# EAGLE board doorctrl (EAGLE 5.10)
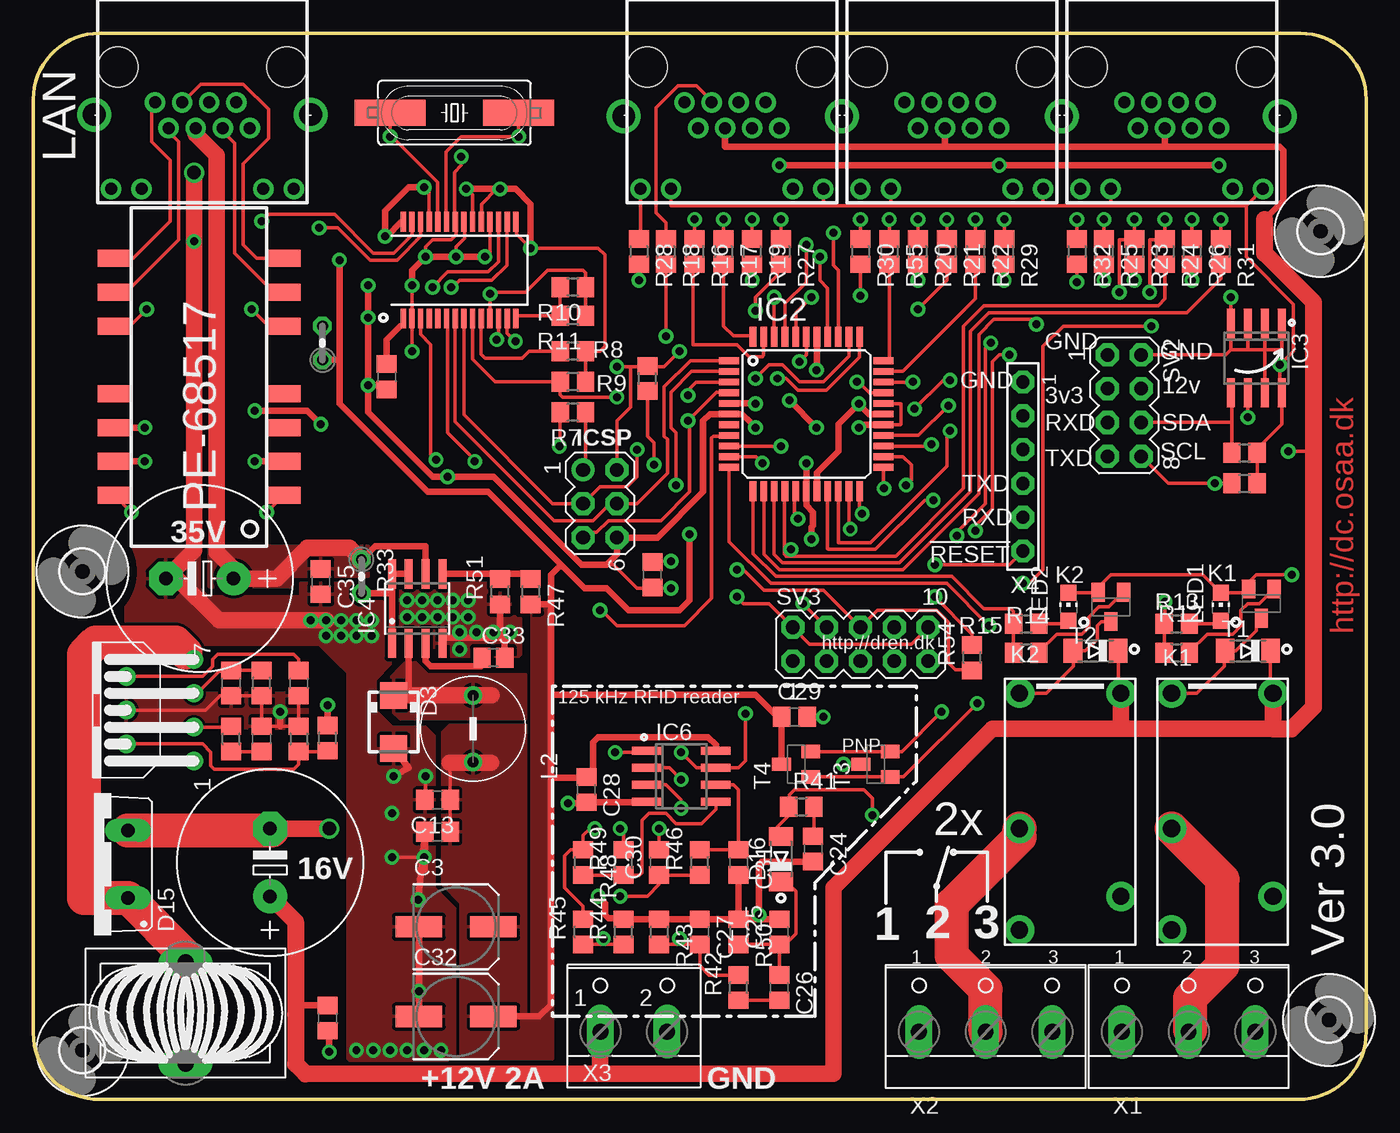
[diagram p0: board, top side]
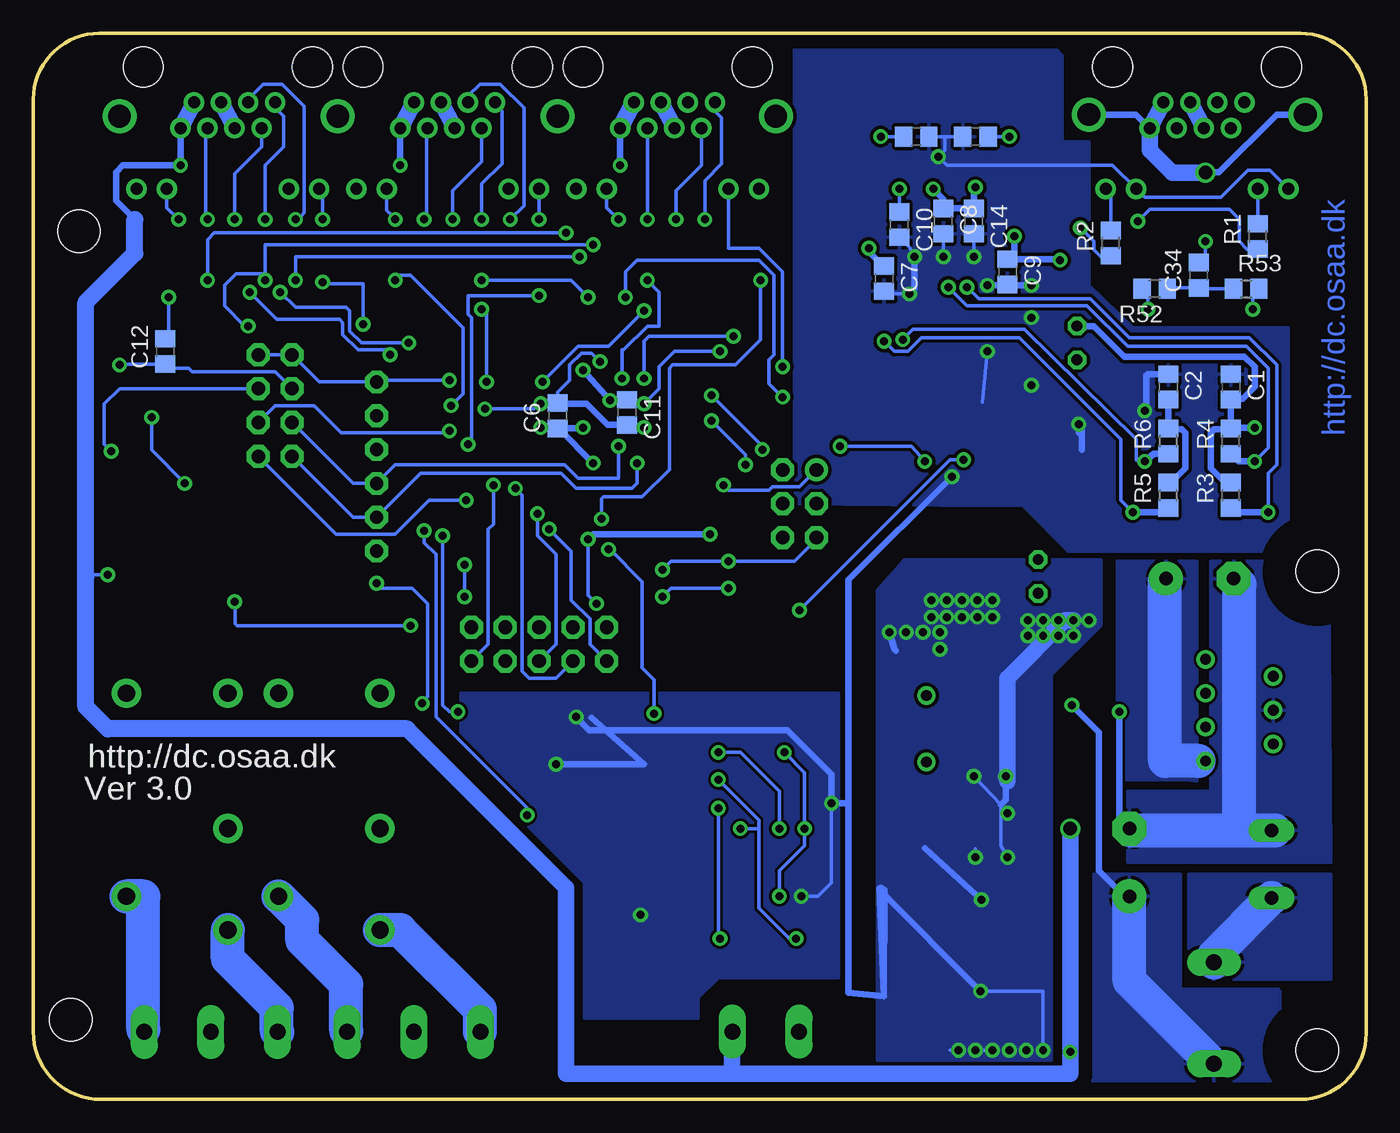
[diagram p1: board, bottom side, seen from below]

Size 100.08 x 80.01 mm. Coordinates in mm from the lower left corner, seen from the top.
Outline: 95.05,80 4.95,80
Outline: 5.08,80.01 4.95,80.01 arc90 0,75.06 0,4.95 arc90 4.95,0 95,0 arc90 100.08,5.08 100.08,75.06 arc90 95.12,80.01 95,80.01
Copper layers (1*16): Top 0.035mm / dielectric 1.5mm / Bottom 0.035mm
Design rules "8mils *": minimum track width 8mil, minimum drill 0.6mm, track to track 8mil, track to pad 8mil, pad to pad 8mil, via to via 8mil, smd to smd 8mil, copper to edge 40mil, drill to drill 10mil, minimum pad ring 8mil, minimum via ring 10mil, stop-mask expansion 0mil, vias tented up to drill 0mil, thermal gap 10mil

## Footprints (pad centres in the part's own frame; a part is rotated, then mirrored left to right if it is on the bottom)
C0805 = smd 1.3 x 1.5: 1 -0.95,0; 2 0.95,0
SANYO-OSCON_SMD_C6 = smd 3.5 x 1.6: + 2.8,0; - -2.8,0
E5-13 = drill 1.016 pad 2.54 round: + -2.54,0 | drill 1.016 pad 2.54 octagon: - 2.54,0
C0805' = smd 1.3 x 1.5: 1 -0.85,0; 2 0.85,0
MINIMELF = smd 1.4 x 1.8: A 1.7,0; C -1.7,0
SMA = smd 2 x 2: A 2,0; C -2,0
TO220ACS = drill 1.016 long: A 2.54,-2.54; C -2.54,-2.54
SSOP28 = smd 0.4 x 1.5: 1 -4.225,-3.625; 2 -3.575,-3.625; 3 -2.925,-3.625; 4 -2.275,-3.625; 5 -1.625,-3.625; 6 -0.975,-3.625; 7 -0.325,-3.625; 8 0.325,-3.625; 9 0.975,-3.625; 10 1.625,-3.625; 11 2.275,-3.625; 12 2.925,-3.625; 13 3.575,-3.625; 14 4.225,-3.625; 15 4.225,3.625; 16 3.575,3.625; 17 2.925,3.625; 18 2.275,3.625; 19 1.625,3.625; 20 0.975,3.625; 21 0.325,3.625; 22 -0.325,3.625; 23 -0.975,3.625; 24 -1.625,3.625; 25 -2.275,3.625; 26 -2.925,3.625; 27 -3.575,3.625; 28 -4.225,3.625
TQFP44 = smd 1.5 x 0.5: 1 -5.8,4; 2 -5.8,3.2; 3 -5.8,2.4; 4 -5.8,1.6; 5 -5.8,0.8; 6 -5.8,0; 7 -5.8,-0.8; 8 -5.8,-1.6; 9 -5.8,-2.4; 10 -5.8,-3.2; 11 -5.8,-4; 23 5.8,-4; 24 5.8,-3.2; 25 5.8,-2.4; 26 5.8,-1.6; 27 5.8,-0.8; 28 5.8,0; 29 5.8,0.8; 30 5.8,1.6; 31 5.8,2.4; 32 5.8,3.2; 33 5.8,4 | smd 0.5 x 1.5: 12 -4,-5.8; 13 -3.2,-5.8; 14 -2.4,-5.8; 15 -1.6,-5.8; 16 -0.8,-5.8; 17 0,-5.8; 18 0.8,-5.8; 19 1.6,-5.8; 20 2.4,-5.8; 21 3.2,-5.8; 22 4,-5.8; 34 4,5.8; 35 3.2,5.8; 36 2.4,5.8; 37 1.6,5.8; 38 0.8,5.8; 39 0,5.8; 40 -0.8,5.8; 41 -1.6,5.8; 42 -2.4,5.8; 43 -3.2,5.8; 44 -4,5.8
SO-08 = smd 0.6 x 2.2: 1 -1.905,-2.6; 2 -0.635,-2.6; 3 0.635,-2.6; 4 1.905,-2.6; 5 1.905,2.6; 6 0.635,2.6; 7 -0.635,2.6; 8 -1.905,2.6
SO08 = smd 0.6 x 2.2: 1 -1.905,-2.6; 2 -0.635,-2.6; 3 0.635,-2.6; 4 1.905,-2.6; 5 1.905,2.6; 6 0.635,2.6; 7 -0.635,2.6; 8 -1.905,2.6
HEPTAWATT = drill 0.813 round: 1 3.81,5.08; 2 2.54,0; 3 1.27,5.08; 4 0,0; 5 -1.27,5.08; 6 -2.54,0; 7 -3.81,5.08
G5SB = drill 1.3 pad 1.93 round: 1 7.62,3.81; 5 7.62,-3.81 | drill 1.3 pad 2.184 round: 2 -2.54,3.81; 3 -10.16,3.81; 4 -7.62,-3.81
0204V@1 = drill 0.813 octagon: 1 -1.27,0; 2 1.27,0
WE-TI_L = drill 0.813 round: 1 -2.5,0; 2 2.5,0
A26GFC = drill 1.194 long: 1 0,3.81; 2 0,-3.81
CHIP-LED0805 = smd 1.2 x 1.2: A 0,-1.05; C 0,1.05
RJ45 = drill 0.9 pad 1.27 round: 1 9.906,2.64; 2 8.89,4.58; 3 7.874,2.64; 4 6.858,4.58; 5 5.842,2.64; 6 4.826,4.58; 7 3.81,2.64; 8 2.794,4.58; 9 13.208,9.144; 10 10.922,9.144; 11 1.778,9.144; 12 -0.508,9.144 | hole 3: 0,0; 12.7,0
HC49UP = smd 5.334 x 1.93: 1 -4.826,0; 2 4.826,0
R0805 = smd 1.3 x 1.5: 1 -0.95,0; 2 0.95,0
0204V = drill 0.813 octagon: 1 -1.27,0; 2 1.27,0
MA03-2 = drill 1.016 round: 1 -2.54,-1.27 | drill 1.016 octagon: 2 -2.54,1.27; 3 0,-1.27; 4 0,1.27; 5 2.54,-1.27; 6 2.54,1.27
MA04-2 = drill 1.016 octagon: 1 -3.81,-1.27; 2 -3.81,1.27; 3 -1.27,-1.27; 4 -1.27,1.27; 5 1.27,-1.27; 6 1.27,1.27; 7 3.81,-1.27; 8 3.81,1.27
MA05-2 = drill 1.016 octagon: 1 -5.08,-1.27; 2 -5.08,1.27; 3 -2.54,-1.27; 4 -2.54,1.27; 5 0,-1.27; 6 0,1.27; 7 2.54,-1.27; 8 2.54,1.27; 9 5.08,-1.27; 10 5.08,1.27
SOT23-BEC = smd 1 x 1.4: B -0.95,-1.1; C 0,1.1; E 0.95,-1.1
PE-68517 = smd 2.54 x 1.27: 1 -7.62,7.62; 2 -7.62,5.08; 3 -7.62,2.54; 4 -7.62,0; 6 -7.62,-5.08; 7 -7.62,-7.62; 8 -7.62,-10.16; 9 5.08,-10.16; 10 5.08,-7.62; 11 5.08,-5.08; 13 5.08,0; 14 5.08,2.54; 15 5.08,5.08; 16 5.08,7.62
3,2 = hole 3.2: 0,0
W237-103 = drill 1.194 long: 1 -5,-1.29; 2 0,-1.29; 3 5,-1.29
W237-102 = drill 1.194 long: 1 -2.5,-1.27; 2 2.5,-1.27
TSW-106-02-S-S = drill 1 pad 1.5 octagon: 1 6.35,0; 2 3.81,0; 3 1.27,0; 4 -1.27,0; 5 -3.81,0; 6 -6.35,0

## Placement (x,y rotation side)
C1  100nF  [C0805]  10.16,53.47 270 bottom
C2  100nF  [C0805]  14.86,53.47 270 bottom
C3  100uF  [SANYO-OSCON_SMD_C6]  31.75,12.95 0 top
C4  15p  [C0805]  29.34,72.26 180 bottom
C5  15p  [C0805]  33.78,72.26 0 bottom
C6  100nF  [C0805]  60.71,51.31 90 bottom
C7  100nF  [C0805]  36.2,61.59 270 bottom
C8  100nF  [C0805]  31.75,65.91 270 bottom
C9  100nF  [C0805]  26.92,62.1 270 bottom
C10  100nF  [C0805]  35.05,65.66 270 bottom
C11  100nF  [C0805]  55.5,51.56 270 bottom
C12  100nF  [C0805]  90.17,56.13 90 bottom
C13  100nF  [C0805]  30.35,22.48 180 top
C14  100nF  [C0805]  29.46,65.91 270 bottom
C15  10uF  [C0805]  30.35,20.07 180 top
C16  10uF  [C0805]  26.54,54.23 270 top
C17  1200uF/35V  [E5-13]  12.5,39.09 180 top
C18  1000uF/16V  [E5-13]  17.78,17.78 90 top
C19  100nF  [C0805]  22.1,6.1 270 top
C20  2.2 uF  [C0805]  19.94,31.24 270 top
C21  2.2 nF  [C0805]  14.86,31.24 270 top
C22  33nF  [C0805]  17.14,27.05 90 top
C23  100nF  [C0805]  46.48,39.37 270 top
C24  3n3  [C0805]  58.55,18.8 270 top
C25  1nF  [C0805]  56.01,12.57 90 top
C26  100nF  [C0805]  56.01,8.38 270 top
C27  1nF  [C0805]  50.04,12.57 270 top
C28  100nF  [C0805]  41.53,23.24 270 top
C29  100nF  [C0805]  57.15,28.7 0 top
C30  1nF  [C0805]  46.99,17.78 90 top
C31  100nF  [C0805]  52.96,17.78 270 top
C32  100uF  [SANYO-OSCON_SMD_C6]  31.75,6.22 0 top
C33  82pF  [C0805']  34.54,33.15 0 top
C34  1nF  [C0805]  12.57,61.85 90 bottom
C35  10uF  [C0805]  21.59,38.86 270 top
D1  [MINIMELF]  91.19,33.66 180 top
D2  [MINIMELF]  79.76,33.66 180 top
D3  SK 34SMA  [SMA]  27.05,28.32 270 top
D15  [TO220ACS]  4.57,17.65 90 top
D16  [MINIMELF]  56.13,18.03 90 top
IC1  ENC28J60SS  [SSOP28]  32,62.23 0 top
IC2  ATMEGA324  [TQFP44]  58.04,51.44 0 top
IC3  24LC64SN  [SO-08]  91.82,55.63 180 top
IC4  MC34063AD  [SO08]  28.83,36.83 0 top
IC5  L4960  [HEPTAWATT]  6.99,29.21 270 top
IC6  LM358  [SO08]  48.64,24.26 270 top
K1  HF33F/012-ZS3 047  [G5SB]  89.28,22.86 90 top
K2  HF33F/012-ZS3 047  [G5SB]  77.85,22.86 90 top
L1  ferrite bead  [0204V@1]  21.72,56.77 90 top
L2  330uH  [WE-TI_L]  33.02,27.81 90 top
L3  220uH  [A26GFC]  11.43,6.48 0 top
LED1  [CHIP-LED0805]  89.15,36.96 0 top
LED2  [CHIP-LED0805]  77.72,36.96 0 top
P0  RJHSE-5085  [RJ45]  91.82,77.47 180 top
P1  RJHSE-5085  [RJ45]  75.31,77.47 180 top
P2  RJHSE-5085  [RJ45]  58.8,77.47 180 top
Q1  25MHz  [HC49UP]  31.62,74.04 0 top
R1  1k  [R0805]  8.13,64.77 90 bottom
R2  1k  [R0805]  19.18,64.26 90 bottom
R3  50R  [R0805]  10.16,45.34 90 bottom
R4  50R  [R0805]  10.16,49.4 90 bottom
R5  50R  [R0805]  14.86,45.34 90 bottom
R6  50R  [R0805]  14.86,49.4 90 bottom
R7  330R  [R0805]  40.51,51.56 180 top
R8  10k  [R0805]  40.51,56.13 180 top
R9  10k  [R0805]  40.51,53.85 180 top
R10  2k7  [R0805]  40.51,60.96 180 top
R11  18k  [R0805]  40.51,58.8 180 top
R12  4k7  [R0805]  85.85,33.53 0 top
R13  1k  [R0805]  85.85,35.69 0 top
R14  4k7  [R0805]  74.55,33.53 0 top
R15  1k  [R0805]  74.55,35.69 0 top
R16  1k  [R0805]  49.66,63.63 270 top
R17  1k  [R0805]  51.82,63.63 270 top
R18  1k  [R0805]  47.5,63.63 270 top
R19  1k  [R0805]  53.98,63.63 270 top
R20  1k  [R0805]  66.42,63.63 270 top
R21  1k  [R0805]  68.58,63.63 270 top
R22  1k  [R0805]  70.74,63.63 270 top
R23  1k  [R0805]  82.68,63.63 270 top
R24  1k  [R0805]  84.96,63.63 270 top
R25  1k  [R0805]  80.39,63.63 270 top
R26  1k  [R0805]  87,63.63 270 top
R27  1k  [R0805]  56.13,63.63 270 top
R28  1k  [R0805]  45.47,63.63 270 top
R29  1k  [R0805]  72.9,63.63 270 top
R30  1k  [R0805]  62.1,63.63 270 top
R31  1k  [R0805]  89.15,63.63 270 top
R32  1k  [R0805]  78.36,63.63 270 top
R33  0.22R  [0204V]  24.64,39.24 270 top
R34  6k2  [R0805]  22.1,27.11 90 top
R35  4k7  [R0805]  19.94,27.05 270 top
R36  15k  [R0805]  14.86,27.05 90 top
R37  4k7  [R0805]  17.14,31.24 90 top
R38  10k  [R0805]  46.1,54.1 90 top
R39  1k  [R0805]  90.93,46.23 0 top
R40  1k  [R0805]  90.93,48.51 0 top
R41  10R  [R0805]  57.66,21.97 0 top
R42  10k  [R0805]  52.96,8.38 90 top
R43  100k  [R0805]  46.99,12.57 270 top
R44  330R  [R0805]  44.32,12.57 90 top
R45  22k  [R0805]  41.27,12.57 90 top
R46  100k  [R0805]  50.04,17.78 90 top
R47  18k  [R0805]  37.34,38.1 270 top
R48  1k  [R0805]  41.27,17.78 270 top
R49  10k  [R0805]  44.32,17.78 90 top
R50  100k  [R0805]  52.96,12.57 270 top
R51  11k  [R0805]  35.05,38.1 90 top
R52  75R  [R0805]  15.88,60.83 180 bottom
R53  75R  [R0805]  9.02,60.83 0 bottom
R54  330R  [R0805]  70.48,33.15 90 top
R55  1k  [R0805]  64.26,63.63 270 top
RJ45  RJHSE-5085  [RJ45]  19.05,77.47 180 top
SV1  ICSP  [MA03-2]  42.55,44.7 270 top
SV2  Ext  [MA04-2]  81.92,52.07 270 top
SV3  JTAG  [MA05-2]  62.1,34.16 0 top
T1  BC817  [SOT23-BEC]  92.2,37.21 180 top
T2  BC817  [SOT23-BEC]  80.9,36.96 180 top
T3  BC807  [SOT23-BEC]  63.25,25.15 90 top
T4  BC817  [SOT23-BEC]  57.28,25.15 90 top
U$1  PE-68517L  [PE-68517]  11.18,52.96 180 top
U$3  [3,2]  3.68,3.68 0 top
U$4  [3,2]  96.65,65.15 0 top
U$5  [3,2]  97.28,5.97 0 top
U$6  [3,2]  3.68,39.62 0 top
X1  [W237-103]  86.74,6.35 0 top
X2  [W237-103]  71.5,6.35 0 top
X3  [W237-102]  45.09,6.35 0 top
X4  ftdi  [TSW-106-02-S-S]  74.3,47.5 90 top

## Library data of the parts
C1-C32 C34 C35 L1 R1-R55 = rcl
C33 = resistor
D1-D3 D15 D16 = diode
IC1 = microchip-6
IC2 = atmel
IC3 = microchip
IC4 = v-reg-3
IC5 = l4960
IC6 = linear
K1 K2 = relay
L2 = wuerth-elektronik
L3 = inductors
LED1 LED2 = led
P0 P1 P2 RJ45 = amp-rj45-tap-up-with-leds
Q1 = crystal
SV1-SV3 = con-lstb
T1-T4 = transistor
U$1 = pulse-pe-68517-ethernet-trafo
U$3-U$6 = holes
X1-X3 = con-wago-500
X4 = con-samtec

## Nets
12VPULSE: D15.C IC5.7 L3.1
!RESET: C23.1 IC2.4 R38.1 R54.1 SV1.5 SV3.6
+3V3: C3.+ C6.1 C7.1 C8.1 C9.1 C10.1 C11.1 C12.1 C13.1 C14.1 C15.1 C28.1 C29.1 C32.+ IC1.15 IC1.19 IC1.20 IC1.25 IC1.28 IC2.5 IC2.17 IC2.27 IC2.29 IC2.38 IC3.8 IC6.8 L1.1 L2.1 P0.10 P0.12 P1.10 P1.12 P2.10 P2.12 R8.1 R9.1 R38.2 R39.2 R40.2 R47.2 SV1.2 SV2.3 SV3.4 T4.C
+12V: C18.+ C19.1 D1.C D2.C K1.5 K2.5 L3.2 P0.4 P0.5 P1.4 P1.5 P2.4 P2.5 R34.2 SV2.4 X3.1
+24V: C17.+ C35.1 IC4.6 IC5.1 R33.1 RJ45.4 RJ45.5
CLOCK: IC1.3 IC2.8
COIL-A: P0.1 R23.1 T3.E T4.E
COIL-B: D16.A P0.2 R24.1 R41.1
DTR: R54.2 X4.6
FC: IC5.3 R36.2
GND: C1.1 C2.1 C3.- C4.2 C5.2 C6.2 C7.2 C8.2 C9.2 C10.2 C11.2 C12.2 C13.2 C14.2 C15.2 C16.2 C17.- C18.- C19.2 C20.2 C21.2 C22.2 C23.2 C24.2 C25.2 C27.1 C28.2 C29.2 C31.2 C32.- C33.2 C34.2 C35.2 D3.A D15.A IC1.2 IC1.11 IC1.18 IC1.21 IC1.22 IC2.6 IC2.18 IC2.28 IC2.39 IC3.1 IC3.2 IC3.3 IC3.4 IC3.7 IC4.4 IC5.4 IC6.4 LED1.C LED2.C P0.7 P0.8 P1.7 P1.8 P2.7 P2.8 R10.1 R11.1 R35.1 R37.1 R43.1 R44.2 R50.1 R51.1 RJ45.7 RJ45.8 RJ45.9 RJ45.11 SV1.6 SV2.1 SV2.2 SV3.2 SV3.10 T1.E T2.E T3.C X3.2 X4.1
ICP: IC2.15 IC6.7 R24.2 R49.2
MEH1: P1.2 R21.1
MEH2: P1.1 R20.1
MISO: IC2.2 R7.1 SV1.1
MOSI: IC1.7 IC2.1 SV1.4
N$1: RJ45.1 U$1.9
N$2: RJ45.2 U$1.10
N$3: RJ45.3 U$1.8
N$4: RJ45.6 U$1.7
N$5: R2.2 RJ45.12
N$6: R1.2 RJ45.10
N$7: IC1.27 R1.1
N$8: IC1.26 R2.1
N$9: C1.2 L1.2 R3.2 R4.2 U$1.14
N$10: P1.3 R55.1
N$11: X4.2
N$12: IC1.10 R8.2
N$13: C2.2 R5.2 R6.2
N$14: X4.3
N$16: IC1.14 R10.2 R11.2
N$17: C16.1 IC1.1
N$18: C4.1 IC1.24 Q1.1
N$19: IC1.6 R7.2
N$20: C5.1 IC1.23 Q1.2
N$21: K2.4 X2.3
N$23: D1.A K1.1 T1.C
N$24: K1.2 X1.2
N$25: R12.2 T1.B
N$26: K1.3 X1.1
N$27: LED1.A R13.2
N$28: D2.A K2.1 T2.C
N$29: R14.2 T2.B
N$30: K1.4 X1.3
N$31: K2.2 X2.2
N$32: K2.3 X2.1
N$33: LED2.A R15.2
N$34: P2.3 R18.1
N$35: P2.2 R17.1
N$37: IC5.2 R34.1 R35.2
N$38: C21.1 IC5.5 R37.2
N$39: C22.1 R36.1
N$40: C20.1 IC5.6
N$41: P2.6 R19.1
N$42: P2.1 R16.1
N$45: R52.2 U$1.6
N$46: IC4.1 IC4.7 IC4.8 R33.2
N$47: R53.2 U$1.11
N$48: P0.3 R25.1
N$51: P2.9 R28.1
N$52: P2.11 R27.1
N$56: P1.6 R22.1
N$57: P1.9 R30.1
N$58: P1.11 R29.1
N$59: P0.6 R26.1
N$60: P0.9 R32.1
N$61: P0.11 R31.1
N$62: C24.1 R41.2
N$63: C25.1 C26.1 D16.C R50.2
N$64: C26.2 R42.1
N$65: C27.2 IC6.3 R42.2 R43.2
N$67: C30.2 IC6.2 R44.1 R45.1
N$68: C33.1 IC4.3
N$69: C31.1 IC6.6 R46.2
N$70: C30.1 IC6.1 R45.2 R46.1 R48.1
N$72: C34.1 R52.1 R53.1
N$76: IC4.5 R47.1 R51.2
N$81: IC6.5 R48.2 R49.1
PA0: IC2.37 R25.2
PA1: IC2.36 R26.2
PA2: IC2.35 R18.2
PA3: IC2.34 R19.2
PA4: IC2.33 R55.2
PA5: IC2.32 R22.2
PA6: IC2.31 R21.2
PA7: IC2.30 R27.2
PB0: IC2.40 R20.2
PB2: IC1.9 IC2.42 R9.2
PB3: IC2.43 R16.2
PB4: IC2.44 R17.2
PC6: IC2.25 R30.2
PC7: IC2.26 R29.2
PD2: IC2.11 R12.1 R13.1
PD3: IC2.12 R14.1 R15.1
PD4: IC2.13 R32.2
PD5: IC2.14 R31.2
PD7: IC2.16 R28.2
RXD: IC2.9 SV2.5 X4.4
SCK: IC1.8 IC2.3 SV1.3
SCL: IC2.19 IC3.6 R39.1 SV2.8
SDA: IC2.20 IC3.5 R40.1 SV2.6
SWE: D3.C IC4.2 L2.2
T1: IC2.41 R23.2 T3.B T4.B
TCK: IC2.21 SV3.1
TDI: IC2.24 SV3.9
TDO: IC2.23 SV3.3
TMS: IC2.22 SV3.5
TPIN+: IC1.13 R5.1 U$1.1
TPIN-: IC1.12 R6.1 U$1.2
TPOUT+: IC1.17 R3.1 U$1.16
TPOUT-: IC1.16 R4.1 U$1.15
TXD: IC2.10 SV2.7 X4.5

## Tracks (layer width: path | path; a pad name or v marks a point on that pad's centre or on a via)
12VPULSE
  Top 1.27: 11.43,33.53 IC5.7
  Top 2.54: 3.81,15.24 3.81,15.11 | 3.81,15.24 3.81,33.4 4.7,34.29 10.67,34.29 11.43,33.53 | 3.81,15.24 3.94,15.11 D15.C 11.43,10.79 L3.1
  Bottom 2.54: L3.1 11.43,10.79 D15.C
  pour Bottom: 13.34,16.89 13.34,9.02 2.67,9.02 2.67,16.89
!RESET  (via drill 0.6)
  Top 0.254: SV1.5 41.66,42.55 42.29,42.55 43.18,43.43 47.12,43.43 49.28,45.59 49.28,50.55 v49.15,50.93 51.31,53.09 52.19,53.09 IC2.4 | R38.1 46.1,49.78 46.61,49.28 v46.61,47.62 | v47.88,40.39 46.55,40.39 C23.1 | v52.83,39.75 53.34,39.75 54.86,38.23 59.31,38.23 SV3.6 63.37,36.7 67.82,36.7 68.71,35.81 68.71,32.77 69.22,32.26 70.42,32.26 R54.1
  Bottom 0.254: v49.15,50.93 46.61,48.39 v46.61,47.62 | SV1.5 41.4,41.91 42.93,40.39 v47.88,40.39 52.2,40.39 v52.83,39.75
+3V3  (via drill 0.6)
  Top 0.254: C28.1 42.04,24.7 | 91.06,67.06 P0.12 | 59.31,67.06 47.88,67.06 P2.10 | 64.39,67.06 75.82,67.06 | 75.82,67.06 80.9,67.06 | 80.9,67.06 91.06,67.06 | 59.31,67.06 P2.12 | 59.31,67.06 64.39,67.06 | 64.39,67.06 P1.10 | 75.82,67.06 P1.12 | 80.9,67.06 P0.10 | 36.32,65.95 IC1.15 36.3,65.79 36.3,64.92 v37.34,63.88 42.42,63.88 42.93,63.37 42.93,56.52 42.55,56.13 R8.1 R9.1 | v35.05,68.33 34.8,68.33 33.66,67.18 33.66,65.88 IC1.19 | IC1.20 32.98,67.9 v32.51,68.33 | IC1.25 29.72,65.87 29.72,68.07 v29.34,68.45 | C15.1 C13.1 31.3,23.94 31.24,25.27 | 27.56,65.79 27.71,65.79 IC1.28 | v54.23,52.2 53.94,52.23 | v61.98,50.42 62.19,50.63 | IC2.27 65.11,50.63 65.15,50.67 65.15,52.2 63.88,52.2 IC2.29 | R40.2 R39.2 91.88,48.83 93.73,50.67 IC3.8 93.6,53.15 v93.6,55.12 94.61,56.13 94.61,59.69 91.06,63.25 91.06,67.06 | 44.83,54.99 v43.81,54.99 | SV1.2 43.81,50.93 44.83,51.94 44.83,54.99 | 46.1,54.99 R38.2 | 46.1,54.99 44.83,54.99 | 46.1,54.99 47.37,54.99 v48.51,56.13 | v57.78,37.21 SV3.4
  Top 0.5: 38.86,24.13 38.86,7.11 37.97,6.22 C32.+ | 38.86,24.13 41.47,24.13 C28.1 | 38.86,24.13 38.86,30.35 | 38.86,30.35 38.86,37.08 | 38.86,37.08 38.86,39.37 39.5,40.01 39.75,40.01 | 34.55,5.85 34.42,5.71 34.42,6.09 | C3.+ 34.67,13.07 | 42.04,24.7 42.04,26.8 42.42,27.18 50.67,27.18 51.24,26.61 IC6.8 | 39.75,40.01 34.16,45.59 29.59,45.59 22.99,52.2 22.99,55.37 | 39.75,40.01 41.4,38.35 43.05,38.35 44.7,36.7 48.51,36.7 49.28,37.47 v49.28,42.42 | v32.51,68.33 v35.05,68.33 36.2,68.33 37.34,67.18 v37.34,63.88 | 22.99,55.37 v22.99,62.99 | R47.2 38.8,37.15 38.86,37.08 | v29.34,68.45 28.19,68.45 26.42,66.67 v26.42,64.77 26.67,64.9 27.56,65.79 | L1.1 22.86,55.5 22.99,55.37 | 53.94,52.23 IC2.5 | 62.19,50.63 IC2.27 | v58.04,47.75 IC2.17 58.04,44.58 58.55,44.07 58.55,43.05 58.42,42.93 v58.42,42.04 | v58.8,50.42 v56.77,52.45 | IC2.38 58.84,54.77 v58.8,54.74 | T4.C 56.18,28.59 56.13,28.64 C29.1 55.88,28.7 54.23,30.35 38.86,30.35
  Top 1.25: 31.24,25.27 34.38,25.27 L2.1
  Bottom 0.254: v35.05,68.33 C10.1 | v29.34,68.45 29.46,68.2 | C11.1 55.18,52.2 | C11.1 56.58,52.51 v56.77,52.45 55.69,52.45 C11.1 | v61.98,50.42 60.77,50.42 C6.1 60.65,50.36 | 58.48,50.36 v58.8,50.42 | P2.10 47.88,63.88 45.59,63.88 43.81,62.1 v43.81,54.99 | v48.51,56.13 51.94,56.13 53.09,54.99 53.09,53.34 v54.23,52.2 | SV2.3 81.92,54.61 88.14,54.61 88.39,54.86 89.85,54.86 C12.1 93.53,55.18 v93.6,55.12 | v57.78,37.21 58.42,37.85 v58.42,42.04
  Bottom 0.5: C7.1 37.34,63.63 v37.34,63.88 | 29.46,68.2 C14.1 C8.1 31.75,67.56 v32.51,68.33 | v22.99,62.99 23.05,63.05 C9.1 26.42,63.56 v26.42,64.77 | 55.18,52.2 v54.23,52.2 | v56.77,52.45 v58.8,54.74 | v58.04,47.75 60.65,50.36 | C6.1 58.48,50.36 | v58.42,42.04 58.04,42.42 v49.28,42.42
  pour Top (isolate 0.254): 36.96,28.07 36.96,3.05 32.26,3.05 32.13,3.17 32.13,14.73 30.73,16.13 30.73,27.56 31.24,28.07
  pour Top: 37.08,3.05 38.99,3.05 38.99,37.21 37.47,37.21 37.47,6.22 36.96,6.22
+12V  (via drill 0.6)
  Top 0.254: D2.C 81.46,30.68 K2.5 82.3,29.84 | K1.5 92.89,30.68 D1.C | 96.14,48.64 v94.23,48.64
  Top 0.5: C19.1 19.75,7.05 19.68,6.35 | v22.1,29.59 R34.2 | P2.4 51.94,71.5 68.45,71.5 | 68.45,71.5 P1.4 | 84.96,71.5 68.45,71.5 | 84.96,71.5 P0.4 | 84.96,71.5 93.6,71.5 93.85,71.25 93.85,67.44 92.46,66.04
  Top 1.25: 81.66,27.81 72.01,27.81 60.07,15.88 60.07,1.91 42.55,1.91 | 81.66,27.81 K2.5 | 81.66,27.81 93.09,27.81 | 18.03,15.88 18.03,15.49 C18.+ | 20.45,1.91 42.55,1.91 | 42.55,1.91 42.55,5.04 X3.1
  Top 1.27: C18.+ 19.68,13.34 19.68,6.35 19.68,2.67 20.45,1.91 | 92.46,66.04 92.46,63.5 96.14,59.82 96.14,48.64 96.14,29.46 94.49,27.81 93.22,27.81 | 93.09,27.81 93.22,27.81 | K1.5 93.09,27.94 93.22,27.81
  Bottom 0.254: SV2.4 93.6,53.34 94.74,52.2 94.74,49.15 v94.23,48.64
  Bottom 0.5: C18.+ 18.16,15.24 20.07,17.14 20.07,27.56 v22.1,29.59
  Bottom 1.25: L3.2 11.94,3.05 | P2.4 P2.5 | P1.4 P1.5 | P0.4 P0.5
  Bottom 2.54: 11.94,3.05 17.78,8.89 C18.+
  pour Bottom: 20.57,1.4 20.45,1.52 20.45,16.89 13.97,16.89 13.97,8.38 13.84,8.26 6.6,8.26 6.48,8.13 6.48,1.4
+24V
  Top 0.5: IC4.6 29.46,41.53 25.65,41.53 R33.1
  Top 1.25: RJ45.4 12.19,72.42 13.77,70.84 13.77,41.06 14.9,39.93 14.9,39.23 C17.+ 18.26,39.09 20.57,41.4 23.75,41.4 R33.1 24.51,40.39
  Bottom 1.25: RJ45.4 RJ45.5 | C17.+ 15.14,38.99
  Bottom 1.27: IC5.1 12.57,25.4
  Bottom 2.54: 12.57,25.4 15.11,25.4 15.11,39.01 C17.+
  pour Top: 13.21,41.53 13.21,38.48 19.43,38.48 19.43,39.24 25.15,39.24 25.15,41.53
  pour Bottom: 13.46,24 18.67,24 18.67,29.72 18.67,40.39 12.7,40.39 12.7,23.88
CLOCK  (via drill 0.6)
  Top 0.254: IC1.3 29.08,57.41 29.84,56.64 29.84,48.39 v30.23,48.01 | IC2.8 52.19,49.78 51.05,49.78 50.93,49.66 50.93,37.59 48.9,35.56 43.81,35.56 42.67,36.7 v42.55,36.7
  Bottom 0.254: v30.23,48.01 31.24,48.01 v42.55,36.7
COIL-A  (via drill 0.6)
  Top 0.254: v82.68,66.04 R23.1 82.62,64.52 81.53,64.52 v81.53,60.58 | v71.88,56.77 71.5,56.39 71.5,44.7 69.34,42.55 v69.34,42.29 | v68.2,29.08 65.21,26.1 T3.E T4.E
  Bottom 0.254: P0.1 81.92,74.42 81.28,73.79 81.28,71.5 82.68,70.1 v82.68,66.04 | v81.53,60.58 80.39,59.44 76.58,59.44 76.33,59.18 76.33,57.66 75.44,56.77 v71.88,56.77 | v69.34,42.29 69.34,29.59 68.83,29.08 v68.2,29.08
COIL-B  (via drill 0.6)
  Top 0.254: 55.93,19.68 D16.A 55.88,20.45 56.64,21.21 56.64,21.91 R41.1 56.77,22.03 56.77,22.86 57.15,23.24 62.36,23.24 62.99,22.61 v62.99,21.34 | v84.96,66.04 R24.1 84.9,64.52 83.82,64.52 v83.82,60.58 | v73.28,55.88 72.52,55.88 72.01,55.37 72.01,44.32 70.74,43.05 v70.74,42.67
  Bottom 0.254: P0.2 82.93,71.5 84.96,69.47 v84.96,66.04 | v83.82,60.58 81.79,58.55 77.09,58.55 76.83,58.29 76.83,57.4 75.69,56.26 73.66,56.26 v73.28,55.88 | v70.74,42.67 70.74,41.78 69.85,40.89 69.85,28.7 63.06,21.91 v62.99,21.34
DTR  (via drill 0.6)
  Top 0.254: R54.2 70.48,34.92 v67.69,37.72 | v67.69,40.13 73.28,40.13 X4.6
  Bottom 0.254: v67.69,37.72 v67.69,40.13
FC
  Top 0.254: IC5.3 14.29,27.94 R36.2
GND  (via drill 0.6, 1, 1.7)
  Top 0.254: R50.1 53.02,13.52 52.96,13.46 R50.1 | C27.1 50.16,13.65 | R50.1 52.51,13.97 | 45.98,22.29 IC6.4 | C28.2 41.21,22.29 | C25.2 55.69,13.59 | IC5.4 12.95,29.21 14.04,30.29 C21.2 R37.1 C22.2 18.54,28 R35.1 C20.2 | C13.2 29.4,21.91 v29.46,24.26 | v26.92,18.16 v29.34,18.16 | IC1.11 v34.28,60.44 v34.29,60.45 34.42,60.58 36.96,60.58 38.61,62.23 41.27,62.23 41.46,62.04 R10.1 R11.1 | 32.38,65.91 IC1.21 32.38,65.8 32.38,64.64 31.75,64.01 v31.75,63.25 | IC1.18 34.28,63.26 v33.91,63.25 | 30.73,63.25 v29.46,63.25 29.46,64.01 29.97,64.52 31.37,64.52 31.75,64.9 31.75,65.78 IC1.22 31.62,65.91 31.62,69.6 32.13,70.1 v32.13,70.74 | v28.45,56.13 28.45,58.59 IC1.2 28.43,61.07 v28.45,61.09 28.32,60.96 | C31.2 53.02,16.89 | LED2.C 79.77,38.01 T2.E 79.95,38.42 80.9,39.37 87.79,39.37 LED1.C 90.95,38.01 T1.E 91.25,38.8 91.82,39.37 v94.49,39.37 | 53.85,50.8 53.85,50.55 v54.23,50.42 | v57.53,55.37 58.04,55.88 IC2.39 | 92.46,56.26 IC3.7 | 92.46,56.26 92.46,56.39 | 92.46,56.39 IC3.2 | IC3.1 93.73,56.26 92.58,56.26 92.46,56.39 | 91.19,56.26 IC3.3 | 91.19,56.26 92.46,56.26 | 89.92,56.26 91.19,56.26 | 43.05,40.13 43.56,40.13 45.34,38.35 46.42,38.35 C23.2 46.55,38.35 v47.88,38.35 | SV2.2 89.53,55.88 89.92,56.26 | v89.92,60.2 IC3.4 89.92,56.26 | v68.83,53.98 68.33,53.98 v66.17,51.82 | v52.83,37.72 53.34,37.21 55.24,37.21 SV3.2 58.29,34.16 65.91,34.16 SV3.10
  Top 0.5: 53.02,13.52 C25.2 | 45.98,22.29 C28.2 41.46,22.23 v40.13,22.23 | C31.2 R50.1 C27.1 R43.1 R44.2 44.26,13.59 43.18,13.59 42.93,13.84 42.93,14.73 v42.42,15.24 | 29.4,17.22 C15.2 v28.89,14.99 | 29.28,13.28 C3.- v28.95,8.13 C32.- | C19.2 22.23,5.08 v22.23,3.56 | v28.45,61.09 28.45,62.23 v29.46,63.25 v31.75,63.25 v33.91,63.25 | v25.15,53.59 v25.15,58.67 v25.15,61.09 | IC4.4 30.75,34.63 35.39,34.63 | 35.39,34.63 C33.2 | D3.A 28.19,24.89 v27.05,24.26 | R51.1 35.05,34.67 v35.81,35.05 | 35.39,34.63 v35.81,35.05 | v35.81,35.05 35.43,34.42 | v18.54,29.08 18.54,28 | v25.15,53.59 26.23,53.59 C16.2 | v16.64,51.69 20.57,51.69 v21.59,50.67 | C24.2 54.68,17.85 54.48,17.65 v54.48,13.84 | v56.01,70.1 v72.52,70.1 v89.03,70.1 | 53.85,50.8 53.21,51.44 IC2.6 50.8,51.44 50.29,50.93 50.29,45.59 46.86,42.16 SV1.6 43.81,40.89 43.05,40.13 41.15,40.13 34.54,46.74 v31.11,46.74 29.97,46.74 25.15,51.56 v25.15,53.59 | IC2.28 62.74,51.44 v61.98,52.2 60.45,50.67 60.45,48.64 58.84,47.03 IC2.18 | v59.31,28.7 C29.2 | v60.83,25.15 T3.C
  Top 1.25: v12.06,69.56 v12.06,64.39 12.06,41.2 C17.- 10.82,39.09 13.97,35.94 v20.83,35.94 v21.97,35.94 | v22.23,20.32 C18.-
  Top 2.54: D15.A 17.91,20.19
  Bottom 0.254: v40.13,22.23 40.13,16.26 41.15,15.24 v42.42,15.24 | v28.95,8.13 24.26,8.13 v24.26,3.68 | v29.34,3.68 v28.07,3.68 | v30.61,3.68 31.24,3.68 | v29.46,24.26 27.43,22.1 27.43,19.05 v26.92,18.16 | v29.34,18.16 29.34,18.8 | 24.96,61.09 C9.2 | v34.29,60.45 36,60.45 C7.2 | v33.91,63.25 34.29,63.95 C10.2 | v31.75,63.25 C8.2 | v29.46,63.25 C14.2 | 31.62,72.26 C4.2 | 31.62,72.26 C5.2 | 31.62,72.26 31.62,71.25 v32.13,70.74 31.5,70.1 19.05,70.1 RJ45.11 16.64,67.69 10.92,67.69 8.89,69.72 7.24,69.72 RJ45.9 | v28.45,56.13 28.83,52.32 | 11.05,69.6 11.94,69.6 12.06,69.47 | v12.06,64.39 12.06,63.05 C34.2 | v94.49,39.37 96.01,39.37 96.14,39.24 | 55.31,50.42 C11.2 | C6.2 60.77,52.2 | C6.2 60.71,53.09 59.82,53.98 59.82,55.12 58.93,56.01 58.17,56.01 v57.53,55.37 | 60.65,52.2 C6.2 | SV2.2 SV2.1 78.61,53.85 X4.1 74.17,53.85 73.79,53.98 v68.83,53.98 | v66.17,51.82 62.48,51.82 v61.98,52.2 | v52.83,37.72 52.2,38.35 v47.88,38.35 | v89.92,60.2 89.92,57.34 C12.2
  Bottom 0.5: 38.86,22.23 v40.13,22.23 40.13,24.38 43.43,27.69 58.35,27.69 v59.31,28.7 | 38.86,22.23 38.86,38.99 v31.11,46.74 | v28.95,8.13 36.55,15.73 | 36.55,15.73 36.44,15.88 36.19,15.74 36.2,7.75 | v28.89,14.99 33.15,18.86 | 36.55,15.73 36.55,15.85 36.2,7.75 | 36.2,7.75 38.86,8 38.86,22.23 | 24.96,61.09 v25.15,61.09 v28.45,61.09 | v33.91,63.25 33.91,60.83 v34.29,60.45 | v25.15,53.59 25.15,53.85 | v20.83,73.91 17.28,73.91 RJ45.8 | v4.57,73.91 6.73,73.91 11.05,69.6 12.03,69.6 v12.06,69.56 | v35.81,35.05 35.43,33.78 35.31,33.66 | v27.05,24.26 27.05,22.48 27.43,22.1 | C18.- 18.54,21.08 v18.54,29.08 | 21.34,50.16 21.34,48.77 | C2.1 16.45,54.42 16.51,54.36 16.51,51.82 v16.64,51.69 | v21.59,50.67 21.59,50.04 | v56.01,70.1 P2.8 | v72.52,70.1 P1.8 | P0.8 v89.03,70.1 93.34,70.1 93.85,69.6 93.85,67.44 92.46,66.04 | v54.23,50.42 55.31,50.42 | 60.77,52.2 v61.98,52.2 | C11.2 56.96,50.61 58.55,52.2 60.65,52.2 | 58.17,28.64 54.23,25.15 v60.83,25.15
  Bottom 1.25: 72.01,27.81 60.07,15.88 60.07,1.91 47.62,1.91 | 47.62,1.91 22.23,1.91 v22.23,3.56 v22.23,20.32 | 47.62,1.91 47.62,5.04 X3.2 | P1.8 P1.7 | P0.8 P0.7 | 9.14,20.19 9.53,20.95 | RJ45.7 RJ45.8 16.26,71.25 14.57,69.55 v12.06,69.56 | v21.97,35.94 22.61,35.94 26.92,31.62 26.92,23.88 v27.05,24.26
  Bottom 1.27: X3.2 47.62,5.08 | P2.8 P2.7 | 92.46,66.04 92.46,63.5 96.14,59.82 96.14,39.24 96.14,29.46 94.49,27.81 72.01,27.81
  Bottom 2.54: 6.86,20.19 D15.A 9.14,20.19 17.65,20.19 C18.- | 9.53,20.95 9.53,38.66 C17.-
  other vias: 25.53,3.68 26.8,3.68 28.07,37.47 28.07,36.2 29.21,37.47 29.21,36.2 30.35,37.47 30.35,36.2 31.5,37.47 31.5,36.2 32.64,37.47 32.64,36.2 32,35.05 32,33.78 33.27,35.05 34.54,35.05 26.92,21.46 23.11,35.94 24.26,35.94 25.4,35.94 25.4,34.8 24.26,34.8 23.11,34.8 21.97,34.8
  pour Bottom (isolate 0.5, no thermals): 39.88,2.03 39.75,1.91 22.86,1.91 22.73,2.03
  pour Bottom (isolate 0.254): 19.94,40.51 34.67,40.51 36.7,38.23 36.7,2.92 23.62,2.92 23.62,31.88 19.94,35.56
  pour Bottom (isolate 0.254): 24.26,79.76 24.13,79.76 22.86,78.36 22.86,71.88 20.83,71.88 20.83,61.09 17.53,57.91 5.84,57.91 5.84,41.15 22.35,41.15 25.78,44.58 32,44.58 42.93,44.7 42.93,79.12 42.42,79.63 24.26,79.63
  pour Top (isolate 0.254): 20.07,35.56 23.62,32 23.62,3.05 23.75,2.92 31.11,2.92 31.62,3.43 31.62,14.35 30.1,15.88 30.1,27.3 29.46,27.94 26.92,27.94 25.78,29.08 25.65,31.5 26.8,32.64 26.8,35.43 28.57,35.43 30.73,33.27 36.45,33.27 36.58,33.4 36.58,36.07 36.32,36.07 35.81,36.58 35.81,38.73 20.07,38.73 20.07,35.69 20.19,35.56
  pour Top: 12.45,41.4 12.45,38.35 13.08,37.72 20.07,37.72 20.07,38.73 23.11,38.73 23.11,32.51 21.46,34.16 6.99,34.16 6.99,41.02 7.37,41.4
  pour Top: 6.99,30.48 20.57,30.48 20.57,27.81 6.99,27.94 6.22,28.7 6.22,29.72
  pour Bottom: 11.68,40.39 11.68,23.11 17.91,23.11 17.91,17.78 2.67,17.78 2.79,40.39
  pour Bottom: 39.88,30.48 67.94,30.48 67.94,25.53 58.67,16.26 58.67,6.1 50.16,6.1 50.16,7.62 48.64,9.14 39.62,9.14 39.62,30.48
ICP  (via drill 0.6)
  Top 0.254: v48.64,26.04 49.78,24.89 IC6.7 52.96,24.89 53.47,25.4 v53.47,28.96 | IC2.15 56.39,45.58 56.39,41.15 | R24.2 84.96,60.07 84.45,59.56 71.37,59.56 69.85,58.04 69.85,45.85 64.77,40.77 56.52,40.77 56.39,40.89 56.39,41.15 | v56.9,41.27 56.77,41.15 56.39,41.15 | R49.2 44.32,20.07 v44.07,20.32
  Bottom 0.254: v44.07,20.32 44.07,23.11 46.99,26.04 v48.64,26.04 | v56.9,41.27 56.77,41.27 54.36,38.86 54.36,32.38 53.47,31.5 v53.47,28.96
MEH1  (via drill 0.6)
  Top 0.254: R21.1 v68.58,66.04
  Bottom 0.254: P1.2 66.42,70.36 68.58,68.2 v68.58,66.04
MEH2  (via drill 0.6)
  Top 0.254: R20.1 v66.42,66.04
  Bottom 0.254: P1.1 65.41,74.68 64.9,74.17 64.9,70.23 66.42,68.71 v66.42,66.04
MISO  (via drill 0.6)
  Top 0.254: R7.1 41.46,47.43 SV1.1 | IC2.2 49.43,54.63 47.88,53.09 47.88,50.42 48.26,50.04 v48.26,46.1
  Bottom 0.254: SV1.1 42.55,45.97 44.58,45.97 44.83,45.72 47.88,45.72 v48.26,46.1
MOSI
  Top 0.254: IC1.7 31.68,50.87 39.12,43.43 42.04,43.43 43.05,44.45 43.56,44.45 SV1.4 45.34,44.7 47.62,46.99 47.62,49.53 47.37,49.78 47.37,53.47 49.34,55.44 IC2.1
N$1
  Top 0.254: RJ45.1 9.14,74.42 8.89,74.17 8.89,71.88 10.29,70.48 10.29,65.91 9.53,65.15 9.46,65.09 7.49,63.12 U$1.9
N$2
  Top 0.254: U$1.10 6.99,60.58 10.1,63.69 10.16,63.75 10.92,64.52 10.92,71.88 10.16,72.64 RJ45.2
N$3
  Top 0.254: U$1.8 16.76,63.12 15.75,64.14 15.75,70.23 17.65,72.14 17.65,74.3 15.75,76.2 12.57,76.2 11.2,74.83 RJ45.3
N$4
  Top 0.254: U$1.7 18.29,60.71 | 18.29,60.71 17.78,60.83 15.11,63.5 15.11,71.75 14.22,72.64 RJ45.6 | 18.29,60.71 18.16,60.83
N$5
  Bottom 0.254: 19.62,68.26 RJ45.12 19.18,67.94 R2.2
N$6
  Bottom 0.254: R1.2 RJ45.10
N$7  (via drill 0.6)
  Top 0.254: v17.14,65.91 17.65,66.42 22.61,66.42 25.53,63.5 27.05,63.5 28.43,64.88 IC1.27
  Bottom 0.254: R1.1 8.96,63.82 9.53,64.39 9.53,66.04 10.29,66.8 16.26,66.8 v17.14,65.91
N$8  (via drill 0.6)
  Top 0.254: IC1.26 29.08,64.77 27.3,62.99 25.27,62.99 22.86,65.41 v21.46,65.41
  Bottom 0.254: R2.1 19.75,63.25 19.94,63.25 20.45,63.75 20.45,64.39 v21.46,65.41
N$9  (via drill 0.6)
  Top 0.5: U$1.14 v8.38,50.42
  Bottom 0.254: 10.09,50.42 R4.2 10.22,50.29 | R3.2 10.22,46.42 10.67,46.35
  Bottom 0.5: v8.38,50.42 10.09,50.42 | 10.67,46.35 11.68,47.37 11.68,50.04 11.43,50.29 10.22,50.29 | R4.2 C1.2 10.1,52.58 9.27,52.58 8.38,53.47 8.38,54.99 9.14,55.75 18.16,55.75 20.45,58.04 L1.2
N$10  (via drill 0.6)
  Top 0.254: R55.1 v64.26,66.04
  Bottom 0.254: P1.3 67.44,75.31 66.55,76.2 65.02,76.2 63.25,74.42 63.25,67.06 v64.26,66.04
N$12
  Top 0.254: IC1.10 33.63,55.91 33.91,55.63 36.7,55.63 37.21,56.13 R8.2
N$13
  Bottom 0.254: 14.93,50.42 R6.2 14.8,50.29 | R5.2 14.67,46.29
  Bottom 0.5: 14.67,46.29 13.59,47.37 13.59,50.04 13.84,50.29 14.8,50.29 | R6.2 C2.2
N$16
  Top 0.254: IC1.14 36.42,58.8 R11.2 R10.2
N$17
  Top 0.254: 27.81,58.57 IC1.1 27.78,58.26 27.56,58.04
  Top 0.5: C16.1 26.54,57.02 27.56,58.04
N$18  (via drill 0.6)
  Top 0.254: IC1.24 30.35,65.88 30.35,68.83 26.92,72.26 v26.8,72.26 Q1.1
  Bottom 0.254: v26.8,72.26 C4.1
N$19  (via drill 0.6)
  Top 0.254: IC1.6 31.11,58.52 31.11,50.04 33.15,48.01 v33.15,47.88 | v39.5,49.02 39.56,49.09 R7.2
  Bottom 0.254: v33.15,47.88 34.16,49.02 v39.5,49.02
N$20  (via drill 0.6)
  Top 0.254: IC1.23 30.99,65.9 30.99,71.12 32.13,72.26 v36.45,72.26 Q1.2
  Bottom 0.254: v36.45,72.26 C5.1
N$21
  Bottom 2: X2.3 76.58,5.14
  Bottom 2.54: 76.58,5.14 76.58,8.64 79.88,11.94 79.88,13.46 K2.4
N$23
  Top 0.254: K1.1 87.38,30.48 89.41,32.51 89.41,33.58 D1.A 90.3,33.66 91.82,35.18 91.82,35.73 T1.C
N$24
  Top 2: X1.2 86.87,5.19
  Top 2.54: 86.87,5.19 86.87,7.62 89.28,10.03 89.28,16.51 K1.2
N$25
  Top 0.254: R12.2 86.8,33.59 88.14,34.92 90.04,34.92 90.68,35.56 90.68,36.7 91.19,37.21 92.05,37.21 T1.B
N$26
  Bottom 2.54: K1.3 85.47,10.54 81.79,6.86 81.79,5.11 X1.1
N$27
  Top 0.254: R13.2 89.06,35.69 LED1.A
N$28
  Top 0.254: T2.C 80.18,35.86 79.88,35.56 79.88,34.54 78.99,33.66 D2.A 78.11,33.61 78.11,32.51 76.07,30.48 K2.1
N$29
  Top 0.254: R14.2 75.5,33.59 76.83,34.92 78.74,34.92 79.25,35.43 79.25,36.2 80.01,36.96 80.75,36.96 T2.B
N$30
  Bottom 2: X1.3 arc45 91.82,5.25
  Bottom 2.54: K1.4 91.82,15.24 91.82,5.25
N$31
  Top 2.54: K2.2 74.04,19.68 68.96,14.61 68.96,10.79 71.5,8.26 X2.2
N$32
  Bottom 2: X2.1 66.55,5.11
  Bottom 2.54: K2.3 72.52,12.7 66.55,6.73 66.55,5.11
N$33
  Top 0.254: R15.2 77.63,35.69 LED2.A
N$34
  Top 0.254: P2.3 50.93,74.93 49.78,76.07 48.39,76.07 46.74,74.42 46.74,66.55 47.5,65.79 R18.1
N$35  (via drill 0.6)
  Top 0.254: R17.1 v51.82,66.04
  Bottom 0.254: P2.2 49.91,70.1 51.82,68.2 v51.82,66.04
N$37
  Top 0.254: IC5.2 12.7,26.67 13.34,26.04 13.34,25.02 13.59,24.77 19.56,24.77 19.94,25.15 R35.2 22.04,26.1 R34.1
N$38
  Top 0.254: IC5.5 12.32,30.73 12.57,30.73 13.97,32.13 14.29,32.13 C21.1 R37.2
N$39
  Top 0.254: R36.1 C22.1
N$40
  Top 0.254: IC5.6 12.7,31.75 13.46,32.51 13.46,33.02 13.84,33.4 19.56,33.4 19.94,33.02 C20.1
N$41  (via drill 0.6)
  Top 0.254: R19.1 v53.98,66.04
  Bottom 0.254: v53.98,66.04 P2.6
N$42  (via drill 0.6)
  Top 0.254: R16.1 v49.66,66.04
  Bottom 0.254: P2.1 48.9,74.17 48.39,73.66 48.39,70.23 49.66,68.96 v49.66,66.04
N$43  (via drill 1.7)
  other vias: 44.32,73.79
N$45  (via drill 0.6)
  Top 0.254: U$1.6 17.65,58.04 v16.38,59.31
  Bottom 0.254: v16.38,59.31 16.38,60.52 R52.2
N$46
  Top 0.5: R33.2 26.86,37.97 26.89,38 | 26.89,38 IC4.8 IC4.7 | IC4.1 26.92,38.61 26.89,38
N$47  (via drill 0.6)
  Top 0.254: U$1.11 7.24,58.04 v8.51,59.31
  Bottom 0.254: v8.51,59.31 8.51,60.39 R53.2
N$48  (via drill 0.6)
  Top 0.254: R25.1 v80.39,66.04
  Bottom 0.254: P0.3 83.95,75.06 82.8,76.2 81.41,76.2 79.76,74.55 79.76,66.55 80.14,66.04 v80.39,66.04
N$50  (via drill 1.7)
  other vias: 60.71,73.79
N$51
  Top 0.254: P2.9 45.59,64.7 R28.1
N$52  (via drill 0.6)
  Top 0.254: R27.1 v56.13,66.04
  Bottom 0.254: P2.11 57.02,66.93 v56.13,66.04
N$53  (via drill 1.7)
  other vias: 77.22,73.79
N$54  (via drill 1.7)
  other vias: 93.6,73.79
N$56  (via drill 0.6)
  Top 0.254: R22.1 v70.74,66.04
  Bottom 0.254: P1.6 70.55,72.83 70.55,66.23 v70.74,66.04
N$57  (via drill 0.6)
  Top 0.254: R30.1 v62.1,66.04
  Bottom 0.254: v62.1,66.04 P1.9
N$58  (via drill 0.6)
  Top 0.254: R29.1 v72.9,66.04
  Bottom 0.254: P1.11 73.53,66.74 73.03,66.23 72.96,66.23 72.9,66.17 v72.9,66.04
N$59  (via drill 0.6)
  Top 0.254: R26.1 v87,66.04
  Bottom 0.254: P0.6 87,72.39 87.12,72.26 87.12,66.17 v87,66.04
N$60  (via drill 0.6)
  Top 0.254: R32.1 v78.36,66.04
  Bottom 0.254: P0.9 78.36,68.07 v78.36,66.04
N$61  (via drill 0.6)
  Top 0.254: R31.1 v89.15,66.04
  Bottom 0.254: P0.11 90.04,66.93 v89.15,66.04
N$62
  Top 0.254: R41.2 58.61,19.81 C24.1
N$63
  Top 0.254: R50.2 C25.1 | C25.1 55.81,11.68 56.52,11.68 57.28,12.45 57.28,15.62 56.56,16.33 D16.C | C25.1 C26.1
N$64
  Top 0.254: R42.1 C26.2
N$65  (via drill 0.6)
  Top 0.254: R43.2 48.51,11.62 | 48.51,11.62 C27.2 50.04,10.03 50.74,9.33 R42.2 | 48.51,11.62 v48.51,12.06 | v48.64,21.84 48.64,22.48 47.5,23.62 IC6.3
  Bottom 0.254: v48.51,12.06 48.64,12.19 v48.64,21.84
N$67  (via drill 0.6)
  Top 0.254: R45.1 42.8,11.62 | 42.8,11.62 R44.1 | IC6.2 47.75,24.89 v48.64,24 | 42.8,11.62 v42.8,12.06 | v46.99,20.32 C30.2
  Bottom 0.254: v48.64,24 45.59,20.95 45.59,20.32 | 45.59,20.32 45.59,14.35 43.31,12.06 v42.8,12.06 | 45.59,20.32 v46.99,20.32
N$68
  Top 0.5: IC4.3 29.46,32.89 29.84,32.51 33.62,32.51 C33.1
N$69
  Top 0.254: R46.2 C31.1 | C31.1 52.96,18.67 | IC6.6 52.58,23.62 52.96,23.24 C31.1
N$70  (via drill 0.6)
  Top 0.254: R48.1 40.32,18.73 39.88,18.29 39.88,15.88 41.27,14.48 R45.2 | IC6.1 45.91,26.04 v43.69,26.04 | R48.1 41.27,18.8 | v42.16,20.32 41.78,20.32 41.27,19.81 R48.1 | R46.1 C30.1 46.99,16.13 46.1,15.24 v44.07,15.24
  Bottom 0.254: v43.69,26.04 42.16,24.51 v42.16,20.32 42.16,19.05 44.07,17.14 v44.07,15.24
N$72
  Bottom 0.254: R53.1 12.25,60.83 C34.1 14.86,60.9 R52.1
N$76
  Top 0.5: IC4.5 35.05,39.43 | 35.05,39.43 R51.2 | 35.05,39.43 36.96,39.43 R47.1
N$81
  Top 0.254: R49.1 44.26,16.76 | R48.2 R49.1 | R49.1 45.53,16.83 45.72,17.02 45.72,20.95 46.23,21.46 47.5,21.46 48.26,20.7 50.16,20.7 51.24,21.78 IC6.5 51.11,22.23 51.18,22.23
PA0  (via drill 0.6)
  Top 0.254: v80.39,61.47 R25.2 | 59.05,62.87 v59.05,63.25 59.05,61.47 59.64,60.88 IC2.37
  Bottom 0.254: v80.39,61.47 80.39,63.25 v59.05,63.25
PA1  (via drill 0.6)
  Top 0.254: v60.07,65.02 60.07,62.61 60.44,62.24 IC2.36 | v87,61.47 R26.2
  Bottom 0.254: v60.07,65.02 86.49,65.02 87,64.52 v87,61.47
PA2  (via drill 0.6)
  Top 0.254: IC2.35 61.24,55.78 59.31,53.85 57.53,53.85 56.26,55.12 55.24,55.12 v54.23,54.1 | v47.5,57.28 R18.2
  Bottom 0.254: v54.23,54.1 54.23,56.9 53.85,57.28 v47.5,57.28
PA3  (via drill 0.6)
  Top 0.254: IC2.34 62.04,55.69 59.56,53.21 57.4,53.21 56.52,54.1 v55.88,54.1 | v53.98,61.47 R19.2
  Bottom 0.254: v55.88,54.1 55.88,56.26 55.75,56.26 53.98,58.04 53.09,58.04 53.09,60.58 v53.98,61.47
PA4
  Top 0.254: IC2.33 64.07,55.44 64.26,55.63 R55.2
PA5
  Top 0.254: IC2.32 65.3,54.63 70.74,60.07 R22.2
PA6  (via drill 0.6)
  Top 0.254: IC2.31 66.03,53.84 v66.04,53.85 | v66.42,59.31 68.58,61.47 R21.2
  Bottom 0.254: v66.04,53.85 66.04,58.93 v66.42,59.31
PA7  (via drill 0.6)
  Top 0.254: IC2.30 62.79,53.03 62.23,53.59 61.85,53.59 v61.85,53.85 | v54.23,59.18 54.23,60.2 55.88,61.85 55.88,62.42 R27.2
  Bottom 0.254: v61.85,53.85 59.18,56.52 56.9,56.52 v54.23,59.18
PB0  (via drill 0.6)
  Top 0.254: v66.42,61.47 R20.2 | IC2.40 57.28,57.27 57.28,59.05 v58.42,60.2
  Bottom 0.254: v66.42,61.47 59.69,61.47 v58.42,60.2
PB2  (via drill 0.6)
  Top 0.254: IC1.9 32.98,55.54 34.67,53.85 R9.2 39.56,52.89 39.75,52.7 v43.81,52.7 | IC2.42 55.63,57.25 v55.63,60.2
  Bottom 0.254: v55.63,60.2 55.63,62.1 54.74,62.99 45.59,62.99 44.45,61.85 44.45,55.88 44.83,55.5 44.83,53.72 v43.81,52.7
PB3
  Top 0.254: R16.2 49.53,62.55 49.53,56.64 52.83,56.64 53.72,55.75 54.74,55.75 54.84,55.85 IC2.43
PB4
  Top 0.254: IC2.44 54.1,57.3 52.56,57.3 51.82,58.04 R17.2
PC6  (via drill 0.6)
  Top 0.254: v62.1,60.33 R30.2 | IC2.25 63.85,49.02 67.31,49.02 v67.44,49.15
  Bottom 0.254: v62.1,60.33 67.44,60.33 67.44,58.93 67.18,58.67 67.18,49.4 v67.44,49.15
PC7  (via drill 0.6)
  Top 0.254: v72.9,61.47 R29.2 | IC2.26 66.47,49.84 v68.71,52.07
  Bottom 0.254: v72.9,61.47 72.9,61.85 71.75,61.85 67.82,57.91 67.82,52.96 v68.71,52.07
PD2  (via drill 0.6)
  Top 0.254: R12.1 R13.1 84.96,35.75 v84.96,37.34 | IC2.11 52.24,41.87 55.37,38.73 68.58,38.73 v71.75,35.56
  Bottom 0.254: v71.75,35.56 84.78,35.56 R13.1 84.9,37.28 v84.96,37.34
PD3
  Top 0.254: R14.1 R15.1 73.6,36.64 73.41,36.83 71.37,36.83 68.96,39.24 55.75,39.24 54.04,40.96 IC2.12
PD4  (via drill 0.6)
  Top 0.254: v75.31,58.17 75.31,58.55 72.14,58.55 70.99,57.4 70.99,45.47 65.28,39.75 56.01,39.75 54.86,40.89 54.86,45.61 IC2.13 | v78.36,61.34 R32.2
  Bottom 0.254: v75.31,58.17 75.31,61.21 78.23,61.21 v78.36,61.34
PD5
  Top 0.254: R31.2 89.15,61.59 86.61,59.05 71.75,59.05 70.36,57.66 70.36,45.59 65.02,40.26 56.26,40.26 55.63,40.89 55.63,45.62 IC2.14
PD7  (via drill 0.6)
  Top 0.254: IC2.16 57.15,45.55 57.15,43.81 v57.4,43.56 | v45.47,61.47 R28.2
  Bottom 0.254: v57.4,43.56 57.4,45.09 57.28,45.21 54.36,45.21 52.32,47.24 52.32,54.86 52.07,55.12 47.37,55.12 45.47,57.02 v45.47,61.47
RXD  (via drill 0.6)
  Top 0.254: IC2.9 56.12,49.03 v56.13,49.02
  Bottom 0.254: v56.13,49.02 56.13,46.61 59.18,46.61 60.2,47.62 72.9,47.62 X4.4 76.07,46.23 SV2.5
SCK  (via drill 0.6)
  Top 0.254: IC1.8 32.33,51.36 38.99,44.7 SV1.3 42.55,45.97 44.58,45.97 45.34,46.74 v45.34,48.77 | IC2.3 49.77,53.84 49.15,53.21 v49.15,52.83
  Bottom 0.254: v49.15,52.83 45.34,49.02 v45.34,48.77
SCL  (via drill 0.6)
  Top 0.254: IC2.19 59.64,41.33 59.69,41.27 63.25,41.27 66.93,44.96 v67.56,44.96 | R39.1 v88.71,46.23 85.22,46.23 SV2.8 | v91.19,51.18 IC3.6
  Bottom 0.254: v88.71,46.23 91.19,48.77 v91.19,51.18 | v67.56,44.96 70.36,44.96 72.9,42.42 77.34,42.42 SV2.8
SDA  (via drill 0.6)
  Top 0.254: IC2.20 60.44,41.8 60.45,41.78 62.87,41.78 68.58,47.5 68.58,49.91 v68.83,50.16 | 89.98,50.93 R40.1 | 89.98,50.93 89.98,52.96 IC3.5 | SV2.6 89.86,50.8 89.98,50.93
  Bottom 0.254: SV2.6 81.92,52.07 78.99,52.07 76.96,50.04 68.96,50.04 v68.83,50.16
SWE
  Top 0.5: IC4.2 28.19,30.96 27.56,30.32
  Top 1.25: D3.C 27.56,30.32 34.41,30.32 L2.2
  pour Top (isolate 0.254): 36.96,31.88 36.96,28.57 27.56,28.57 26.29,29.72 26.29,31.11 28.19,33.02 28.45,33.02 29.59,31.88
T1  (via drill 0.6)
  Top 0.254: v82.68,61.47 R23.2 | IC2.41 56.44,59.74 58.04,61.34 v58.04,64.14 | v70.87,29.72 65.34,24.2 T3.B T4.B | v74.3,38.73 74.8,38.73 75.82,39.75 75.82,56.52 77.34,58.04 v83.95,58.04
  Bottom 0.254: v58.04,64.14 82.68,64.14 82.68,61.98 | 82.68,61.98 v82.68,61.47 | v83.95,58.04 84.2,58.04 85.72,59.56 85.72,61.09 84.84,61.98 82.68,61.98 | v70.87,29.72 70.87,29.84 70.48,30.23 70.48,37.21 71.63,38.35 73.91,38.35 v74.3,38.73
TCK  (via drill 0.6)
  Top 0.254: IC2.21 61.24,42.9 v61.34,42.8
  Bottom 0.254: SV3.1 58.29,34.16 58.29,36.07 59.69,37.47 59.69,41.15 v61.34,42.8
TDI  (via drill 0.6)
  Top 0.254: IC2.24 65.3,48.23 65.91,47.62 65.91,46.48 v65.53,46.1
  Bottom 0.254: SV3.9 65.91,34.16 65.91,42.8 65.53,43.18 v65.53,46.1
TDO  (via drill 0.6)
  Top 0.254: IC2.23 63.84,45.89 v63.88,45.85
  Bottom 0.254: v63.88,45.85 63.37,45.34 63.37,32.13 62.87,31.62 60.83,31.62 SV3.3
TMS  (via drill 0.6)
  Top 0.254: IC2.22 62.04,44.13 v62.23,43.94
  Bottom 0.254: v62.23,43.94 62.23,42.29 60.83,40.89 60.83,34.16 SV3.5
TPIN+  (via drill 0.6)
  Top 0.254: v17.53,44.07 U$1.1 | IC1.13 35.58,57.51 v36.2,56.9
  Bottom 0.254: R5.1 14.93,44.07 | v36.2,56.9 35.43,56.13 34.42,56.13 33.4,57.15 26.04,57.15 18.41,49.53 18.41,44.96 v17.53,44.07
  Bottom 0.5: 14.93,44.07 v17.53,44.07
TPIN-  (via drill 0.6)
  Top 0.254: v34.8,57.02 34.92,57.15 IC1.12
  Top 0.5: v16.64,47.88 U$1.2
  Bottom 0.254: v34.8,57.02 34.04,57.78 25.65,57.78 17.27,49.53 17.27,48 17.24,47.97 16.68,47.84 v16.64,47.88
  Bottom 0.5: R6.1 15.94,48.45 v16.64,47.88
TPOUT+  (via drill 0.6)
  Top 0.254: U$1.16 v7.37,44.07 | v29.97,60.96 31.11,62.1 34.16,62.1 34.92,62.87 IC1.17
  Bottom 0.254: 10.1,44.07 R3.1 | v29.97,60.96 29.08,60.07 20.7,60.07 17.78,57.15 8.76,57.15 6.73,55.12 6.73,47.62 7.37,46.99 v7.37,44.07
  Bottom 0.5: v7.37,44.07 10.1,44.07
TPOUT-  (via drill 0.6)
  Top 0.254: IC1.16 35.56,65.84 35.56,62.61 34.42,61.47 32,61.47 31.5,60.96 v31.37,60.96
  Top 0.5: U$1.15 v8.38,47.88
  Bottom 0.254: v31.37,60.96 29.97,59.56 20.95,59.56 17.91,56.52 9.02,56.52 7.37,54.86 7.37,48.9 v8.38,47.88
  Bottom 0.5: v8.38,47.88 9.59,47.88 R4.1
TXD  (via drill 0.6)
  Top 0.254: IC2.10 54.25,48.23 v54.74,47.75
  Bottom 0.254: v54.74,47.75 54.74,46.23 55.12,45.85 59.31,45.85 60.45,46.99 70.99,46.99 X4.5 76.07,43.69 SV2.7

## Text on the board
Top: http://dc.osaa.dk
Bottom: http://dc.osaa.dk
tPlace: LAN | GND | GND | GND | 12v | 3v3 | ICSP | RXD | SDA | SCL | TXD | TXD | RXD | 35V | !RESET | K2 | K1 | http://dren.dk | 125 kHz RFID reader | PNP | 2x | 16V | 1 | 2 | 3 | Ver 3.0 | 1 | 2 | 3 | 1 | 2 | 3 | +12V 2A | GND
bPlace: http://dc.osaa.dk | Ver 3.0